# Altium PCB PCB1.PcbDoc
Units mil, origin at the board's own origin, x right, y up, seen from the top; angles counter-clockwise.
Board outline 6000 x 4000 mil, 2 copper layers (Top Layer, Bottom Layer); 15 components, 9 nets, 56 pads, 2 vias.
Unrouted connection lines stored in the file: 2.
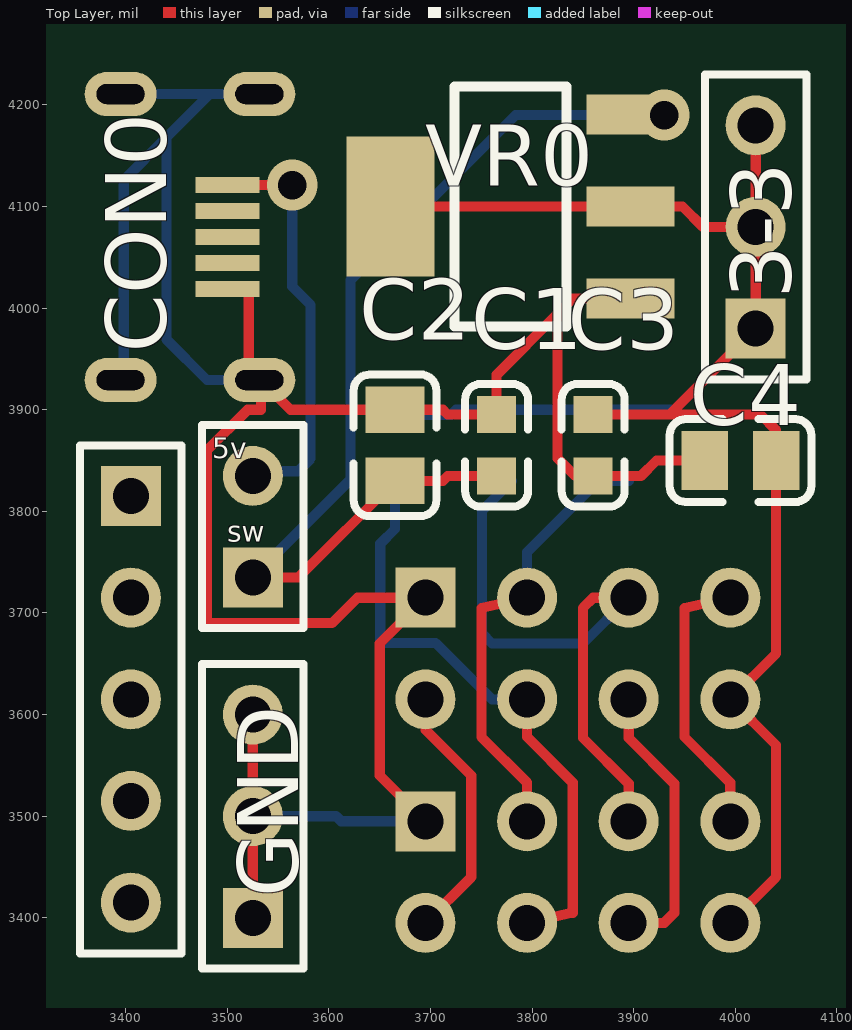
[diagram p0: Top Layer view]
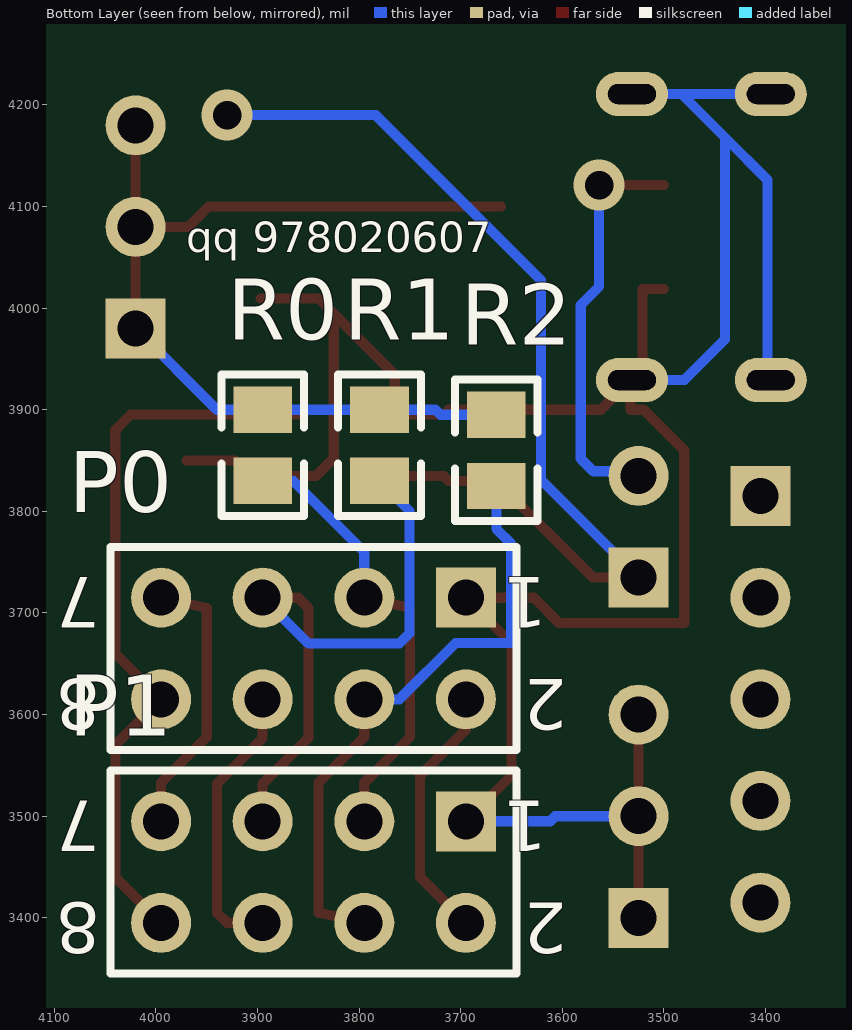
[diagram p1: Bottom Layer view, seen from below]
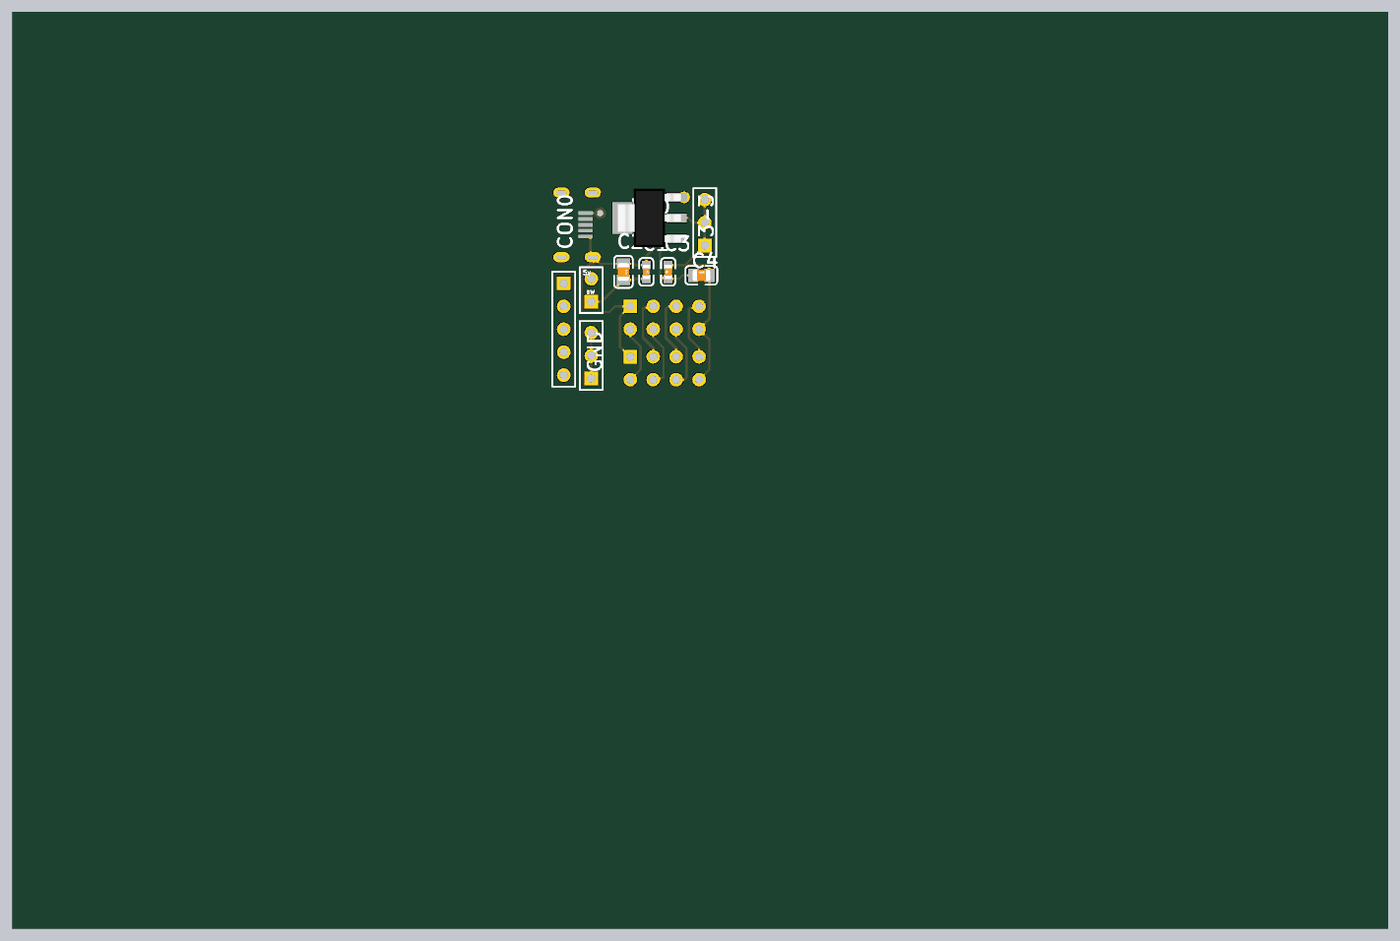
[diagram p2: 3D render of the assembled board from above, using the file's embedded part models]
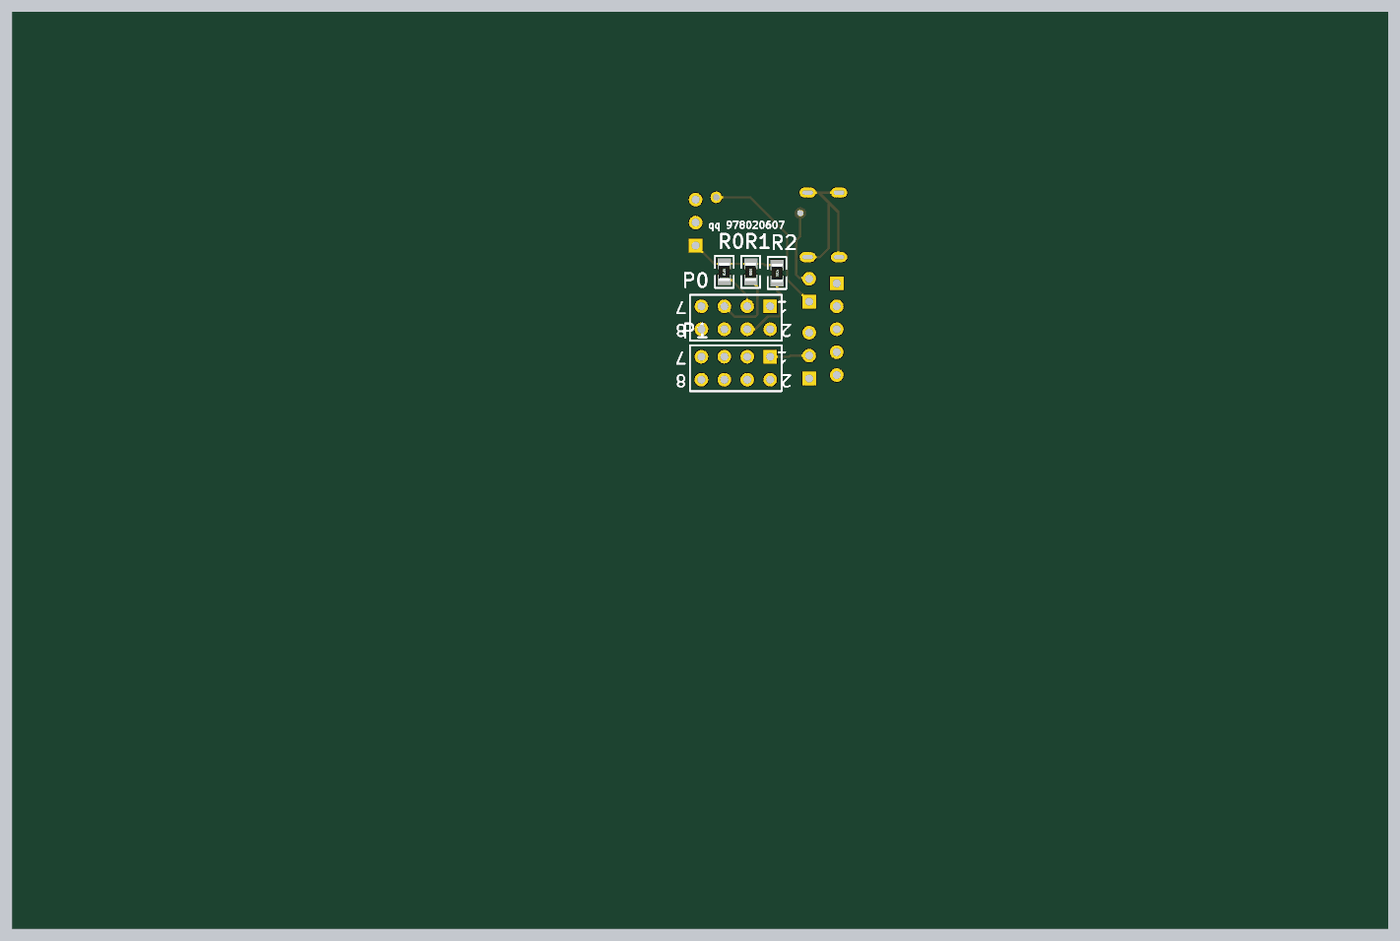
[diagram p3: 3D render of the assembled board from below, using the file's embedded part models]

## Layer stack, top to bottom
Top Solder: solder mask 0.4, Solder Resist, Dk 3.5
Top Layer: signal copper 1.4
Dielectric 1: dielectric 12.6, FR-4, Dk 4.8
Bottom Layer: signal copper 1.4
Bottom Solder: solder mask 0.4, Solder Resist, Dk 3.5

## Board outline
1000,1000 7000,1000 7000,5000 1000,5000

## Design rules (kind name [scope] priority, off if disabled: settings)
Clearance [All] p1: gap=10 ignorepadtopadclearanceinfootprint=FALSE except(0: Arc-Hole Track-Hole SMDPad-Hole THPad-Hole Via-Hole Fill-Hole Poly-Hole Region-Hole Text-Hole)
PolygonConnect [All] p1: connectstyle=Relief reliefconductorwidth=10 reliefentries=4 polygonreliefangle="90 Angle" airgapwidth=10
RoomDefinition Sheet1 [InComponentClass('Sheet1')] p1: confinementstyle=ConfineIn formatcopy=TRUE lockcomponents=FALSE outline 3335,4250 3335,3325 4100,3325 4100,4250
RoutingVias [All] p1: holewidth=28 width=50 viastyle="Through Hole" minholewidth=28 minwidth=50 maxholewidth=28 maxwidth=50
SolderMaskExpansion [All] p1: expansion=4
Width [All] p1: maxlimit=10 minlimit=10 preferedwidth=10
30 further rules are at their usual default settings.

## Classes and differential pairs
component class Sheet1: 3-3 5v C2 C3 C4 CON0 GND P0 P1 R0 R1 R2 VR0

## Components (designator, comment, footprint, x,y, rotation, side; value= is the part's Value field where it differs from the comment)
3-3 "Header 3" HDR1X3 4020,3980 r90 top
5v "Header 2" HDR1X2 3525,3735 r90 top (schematic designator P2)
C1 "10uF (106) 10% 10V" LC-0603_C 3765,3865 r270 top
C2 "100nF(104) 10% 50V" LC-0805_C 3665,3865 r270 top
C3 "10uF (106) 10% 10V" LC-0603_C 3860,3865 r90 top
C4 "100nF(104) 10% 50V" LC-0805_C 4005.04,3850 r0 top
CON0 "USB_Connector" MicroUSB 3531.5,4070 r0 top
GND "Header 3" HDR1X3 3525,3400 r90 top
P0 "Header 4X2" HDR2X4 3695,3715 r0 bottom
P1 "Header 4X2" HDR2X4 3695,3495 r0 bottom
R0 "10KΩ (1002) ±1%" LC-0805_R 3895,3865 r90 bottom
R1 "10KΩ (1002) ±1%" LC-0805_R 3780,3865 r90 bottom
R2 "10KΩ (1002) ±1%" LC-0805_R 3665,3860 r90 bottom
VR0 "AMS1117-3.3" LC-SOT-223 3778.82,4100 r0 top
? "Comment" HDR1X5 3405,3815 r270 top

## Footprints (in the part's own frame and the unit in brackets; to place one, negate y for a bottom-side part, rotate by r counter-clockwise, add the part's x,y. Pads: shape width x height; smd on the part's side, far side on the other; paste and mask are expansions set on the pad)
HDR1X2 [mm] "Connector; Header; 2 Position"
  rect 1.5x1.5 hole 0.9: 1(0,0)
  round 1.5 hole 0.9: 2(2.54,0)
  silkscreen extent -1.27,-1.27 3.81,1.27
HDR1X3 [mm] "Connector; Header; 3 Position"
  rect 1.5x1.5 hole 0.9: 1(0,0)
  round 1.5 hole 0.9: 2(2.54,0) 3(5.08,0)
  silkscreen extent -1.27,-1.27 6.35,1.27
HDR1X5 [mm] "Connector; Header; 5 Position"
  rect 1.5x1.5 hole 0.9: 1(0,0)
  round 1.5 hole 0.9: 2(2.54,0) 3(5.08,0) 4(7.62,0) 5(10.16,0)
  silkscreen extent -1.27,-1.27 11.43,1.27
HDR2X4 [mm] "Connector; Header; 4x2 Position"
  rect 1.5x1.5 hole 0.9: 1(0,0)
  round 1.5 hole 0.9: 2(0,2.54) 3(2.54,0) 4(2.54,2.54) 5(5.08,0) 6(5.08,2.54) 7(7.62,0) 8(7.62,2.54)
  silkscreen extent -1.27,-1.27 8.89,3.81
LC-0603_C [mm]
  rect 0.93x0.98 smd: 1(-0.77,0) 2(0.77,0)
  silkscreen extent -1.54,-0.79 1.54,0.79, body extent -0.8,-0.4 0.8,0.4, height 0.3
LC-0805_C [mm]
  rect 1.16x1.47 smd: 1(-0.89,0) 2(0.89,0)
  silkscreen extent -1.77,-1.04 1.77,1.04, body extent -1,-0.62 1,0.63, height 0.77
LC-0805_R [mm]
  rect 1.16x1.47 smd: 1(-0.89,0) 2(0.89,0)
  silkscreen extent -1.77,-1.03 1.77,1.03, body extent -1,-0.63 1,0.63, height 0.49
LC-SOT-223 [mm]
  rect 2.2x1 smd: 1(3,-2.3) 2(3,0) 3(3,2.3)
  rect 2.2x3.5 smd: 2(-3,0)
  silkscreen extent -1.4,-3 1.4,3, body extent -3.49,-3.24 3.49,3.24, height 1.64
MicroUSB [mm]
  rect 1.6x0.4 smd mask+0.05: 1(-0.8,1.3) 2(-0.8,0.65) 3(-0.8,0) 4(-0.8,-0.65) 5(-0.8,-1.3)
  oval 1.8x1.1 hole 0.5 slot 1.2 at 0 deg: GND(-3.47,-3.575) GND(-3.47,3.575) GND(0,-3.575) GND(0,3.575)

## Part data
3-3 GND: "Header, 3-Pin", LatestRevisionDate=17-Jul-2002, LatestRevisionNote="Re-released for DXP Platform.", Publisher="Altium Limited"
5v: "Header, 2-Pin", LatestRevisionDate=17-Jul-2002, LatestRevisionNote="Re-released for DXP Platform.", Publisher="Altium Limited"
C1 C3: library part "0603 10uF (106) 10% 10V", "贴片电容", Package=0603, SuppliersPartNumber=C19702, ComponentLink1Description=供?, ComponentLink1URL=http://www.szlcsc.com/product/details_20411.html, Supplier=LC
C2 C4: library part "0805 100nF(104) 10% 50V", "贴片电容", Package=0805, SuppliersPartNumber=C49678, ComponentLink1Description=供?, ComponentLink1URL=http://www.szlcsc.com/product/details_50686.html, Supplier=LC
P0 P1: "Header, 4-Pin, Dual row", LatestRevisionDate=17-Jul-2002, LatestRevisionNote="Re-released for DXP Platform.", Publisher="Altium Limited"
R0 R1 R2: library part "0805 10KΩ (1002) 1%", "贴片电阻", Package=0805, SuppliersPartNumber=C17414, ComponentLink1Description=供?, ComponentLink1URL=http://www.szlcsc.com/product/details_18102.html, Supplier=LC
VR0: library part "SOT-223 AMS1117-3.3", "低压差线性稳压(LDO)", Package=SOT-223, SuppliersPartNumber=C6186, ComponentLink1Description=供?, ComponentLink1URL=http://www.szlcsc.com/product/details_6652.html, Supplier=LC

## Via types
v1: diameter 50, hole 28, Top Layer to Bottom Layer, tented both sides, 1 vias
v2: diameter 50, hole 28, Top Layer to Bottom Layer, 1 vias

## Nets (pads, with @x,y where several pads share a name; then routed paths per layer and width w, separated by ;. In a path a pad name is that pad's centre, name@x,y a point inside that pad or via, vN(x,y) a via of type N, cw(c..) or ccw(c..) an arc to the next point about the centre after c; other vN are vias at no path point)
Net3-3_1: 3-3.1 3-3.2 3-3.3 C3.2 C4.2 P0.8 P1.8 R0.2 R1.2 R2.2 VR0.2 | length 1804.9
  Top Layer w10: VR0.2@3660.71,4100 3896.93,4100 3948,4100 3968,4080 3-3.2 ; C3.2 3935.32,3895.32 ; P1.8 4040,3440 4040,3570 P0.8 4040.08,3660.08 C4.2 4040.08,3880 4024.76,3895.32 3935.32,3895.32 ; 3-3.3 3-3.2 ; 3935.32,3895.32 3-3.1 3-3.2
  Bottom Layer w10: R2.2 3720,3895.04 3725,3900.04 R1.2 R0.2 3940.04,3900.04 3-3.1
NetC1_1: C1.1 C2.1 C3.1 C4.1 CON0.5 CON0.GND GND.1 GND.2 GND.3 P0.1 P1.1 VR0.1 | length 2758.2
  Top Layer w10: CON0.5 3521,4018.82 3521,3929.25 3531.5,3929.25 CON0.GND@3533,3929.25 ; GND.1 GND.2 GND.3 ; P1.1 3650,3540 3650,3670 P0.1 3628,3715 3603,3690 3480,3690 3480,3860.04 3520,3900.04 3533,3900.04 CON0.GND@3533,3929.25 ; VR0.1 3840,4009.45 3825,3994.45 ; C4.1 3922.31,3850 3907,3834.69 C3.1 3842.63,3834.69 3825,3852.32 3825,3994.45 ; CON0.GND@3533,3929.25 3562.21,3900.04 C2.1 3712,3900.04 3716.72,3895.32 C1.1 3765,3934.45 3825,3994.45
  Bottom Layer w10: CON0.GND@3394.88,3929.25 3398,3929.25 3398,4126 3440,4168 ; CON0.GND@3394.88,4210.75 3482.75,4210.75 ; GND.2 3607,3500 3612,3495 P1.1 ; CON0.GND@3531.5,3929.25 3480,3929.25 3440,3969.25 3440,4168 ; CON0.GND@3531.5,4210.75 3482.75,4210.75 ; 3440,4168 3482.75,4210.75
NetC1_2: 5v.1 5v.2 C1.2 C2.2 CON0.1 VR0.3 | length 1215
  Top Layer w10: CON0.1 v1(3563.82,4121.18) ; C2.2 3712,3829.96 3716.73,3834.69 C1.2
  Bottom Layer w10: 5v.1 3621.06,3831.06 3621.06,4027.43 3783.64,4190 v2(3930,4190) ; 5v.2 3529.53,3839.53 3569.53,3839.53 3581.93,3851.93 3581.93,4003.16 3563.82,4021.27 v1(3563.82,4121.18)
NetP0_2: P0.2 P1.2 | length 257.3
  Top Layer w10: P1.2 3740,3440 3740,3540 3695,3585 P0.2
NetP0_3: P0.3 P1.3 R0.1 | length 448.7
  Top Layer w10: P1.3 3795,3533 3750,3578 3750,3705 P0.3
  Bottom Layer w10: P0.3 3795,3760 3864.96,3829.96 R0.1
NetP0_4: P0.4 P1.4 R2.1 | length 602.7
  Top Layer w10: P1.4 3840,3405 3840,3533 3795,3578 P0.4
  Bottom Layer w10: R2.1 3665,3782.66 3650.47,3768.13 3650.47,3670.47 3705,3670.47 3760.47,3615 P0.4
NetP0_5: P0.5 P1.5 R1.1 | length 607.3
  Top Layer w10: P1.5 3895,3532 3850,3577 3850,3705 3860,3715 P0.5
  Bottom Layer w10: R1.1 3750.47,3800.43 3750.47,3680 3760.47,3670 3850,3670 P0.5
NetP0_6: P0.6 P1.6 | length 277.8
  Top Layer w10: P1.6 3930,3395 3940,3405 3940,3532 3895,3577 P0.6
NetP0_7: P0.7 P1.7 | length 274.7
  Top Layer w10: P1.7 3995,3533 3950,3578 3950,3705 P0.7
pads on no net: ?.1 ?.2 ?.3 ?.4 ?.5 CON0.2 CON0.3 CON0.4
copper on no net: | length 179.3
  Top Layer w10: 3525,3735 3570.04,3735 3665,3829.96

## Silkscreen, mask and mechanical layers (free items; w line width, h text height)
Top Overlay:
  text "sw" at 3500,3770 h20
Bottom Overlay:
  text "qq 978020607" at 3970,4055 h30
Mechanical 1:
  lines w10: 3335,3345 3335,4240 3345,4250 4085,4250 4100,4235 4100,3350 4075,3325 3355,3325 3335,3345

## Text inside footprints (layer, text, board x,y; h text height)
P0: Bottom Overlay "2" at 3595,3635 h50 r180; Bottom Overlay "1" at 3615,3735 h50 r180; Bottom Overlay "7" at 4055,3735 h50 r180; Bottom Overlay "8" at 4055,3635 h50 r180
P1: Bottom Overlay "2" at 3595,3415 h50 r180; Bottom Overlay "1" at 3615,3515 h50 r180; Bottom Overlay "7" at 4055,3515 h50 r180; Bottom Overlay "8" at 4055,3415 h50 r180